# Altium PCB chinook_pcb_rotor.PcbDoc (part 2 of 2)
Units mil, origin at the board's own origin, x right, y up, seen from the top; angles counter-clockwise.
Board outline 4240 x 2750 mil, 2 copper layers (Top Layer, Bottom Layer); 69 components, 52 nets, 279 pads, 85 vias.
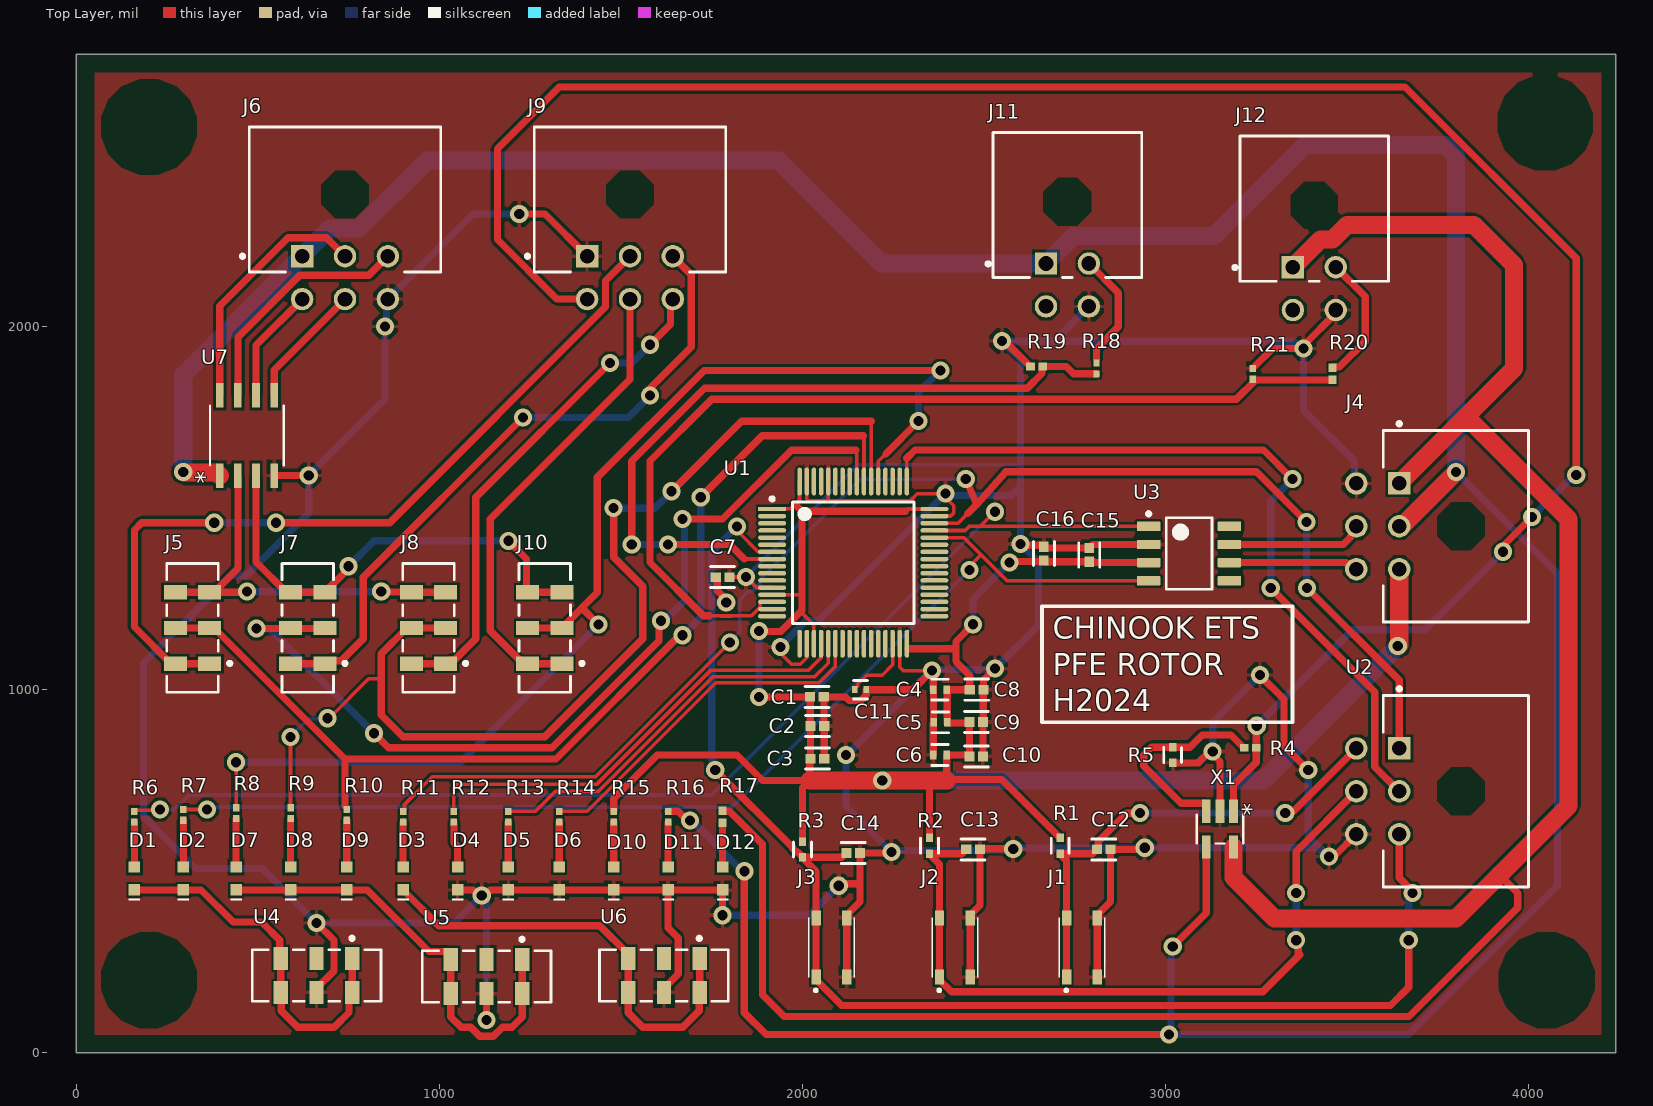
[diagram p0: Top Layer view]

## Via types
v1: diameter 50, hole 28, Top Layer to Bottom Layer, 85 vias

## Nets (pads, with @x,y where several pads share a name; then routed paths per layer and width w, separated by ;. In a path a pad name is that pad's centre, name@x,y a point inside that pad or via, vN(x,y) a via of type N, cw(c..) or ccw(c..) an arc to the next point about the centre after c; other vN are vias at no path point) (continued)
+12: (continued)
  Top Layer w20: J9.4 1324.21,2075.79 1160,2240 1160,2490 1330,2660 3660,2660 4131.48,2188.52 v1(4131.48,1590.98) ; X1.1 3187.4,737.4 3250,800 R4.2 3250,899.09 v1(3251.54,900.63) ; v1(3930,1380) 3930,1395.8 v1(4009.75,1475.55)
  Bottom Layer w20: v1(3251.54,900.63) 3515.91,1165 3715,1165 v1(3930,1380) ; v1(4009.75,1475.55) 4125.18,1590.98 v1(4131.48,1590.98)
BUSY_N: J7.1 J7.5 J9.3 | length 1849.1
  Top Layer w20: J7.5 J7.1 692.91,1080 730,1080 790,1140 790,1310 v1(1230,1750) ; v1(1580,1810) 1578.28,1811.72 1578.28,1828.28 1694.02,1944.02 1694.02,2142.99 J9.3
  Bottom Layer w20: v1(1230,1750) 1520,1750 v1(1580,1810)
BUSY_P: J5.1 J5.5 J9.2 | length 2236
  Top Layer w20: J5.1 J5.5 260.94,1071.57 160,1172.52 160,1440 180,1460 v1(380,1460) ; v1(550,1460) 863.09,1460 1457.8,2054.7 1457.8,2126.69 J9.2
  Bottom Layer w20: v1(380,1460) v1(550,1460)
DATA_H: J8.1 J8.5 J9.6 | length 1401.5
  Top Layer w20: J8.5 J8.1 1026.93,1081.26 1041.26,1081.26 1100,1140 1100,1530 v1(1470,1900) ; v1(1580,1950) 1636.76,2006.76 1636.76,2069.44 J9.6
  Bottom Layer w20: v1(1470,1900) 1530,1900 v1(1580,1950)
DATA_L: J9.5 J10.1 J10.5 | length 1307.7
  Top Layer w20: J10.1 J10.5 1230.94,1071.57 1140,1162.52 1140,1470 1525,1855 J9.5
ENC1_CLOCK: J6.5 U7.5 | length 346
  Top Layer w20: U7.5 545,1880.79 J6.5
ENC1_DATA: J6.2 U7.8 | length 690.4
  Top Layer w20: U7.8 395,2057.1 582.7,2244.8 689.09,2244.8 J6.2
ENC1_NCLOCK: J6.4 U7.6 | length 317.8
  Top Layer w20: U7.6 495,1948.9 J6.4
ENC1_NDATA: J6.3 U7.7 | length 665.8
  Top Layer w20: U7.7 445,1970.89 615.5,2141.39 805.6,2141.39 J6.3
GND: C1.2 C2.2 C3.2 C4.2 C5.2 C6.2 C7.2 C8.2 C9.2 C10.2 C11.2 C12.2 C13.2 C14.2 C15.2 C16.2 D4.1 D5.1 D6.1 D10.1 D11.1 D12.1 J1.3 J1.4 J2.3 J2.4 J3.3 J3.4 J4.4 J6.6 J9.1 J11.4 J12.4 R5.1 R19.1 R21.1 U1.12 U1.18 U1.31 U1.47 U1.60 U1.63 U2.6 U3.2 U4.6 U5.6 U6.6 U7.4 X1.2 | length 17401.6
  Top Layer w10: C7.2 1799.16,1310.32 1843.95,1310.32 v1(1844.26,1310.63) 1873.35,1281.54 1916.12,1281.54 U1.12 ; v1(1940,1118) 1947.65,1110.35 1947.65,1092.35 1970,1070 1993.81,1070 2011.61,1087.79 2011.61,1126.12 U1.18 ; U1.63 2012.05,1525.81 2017.91,1519.96 2070,1519.96 ; U1.60 2070.66,1573 2070.66,1520.62 2070,1519.96 ; U1.31 2267.95,1062.05 2277.41,1052.59 v1(2356.63,1052.59) ; U1.47 2363.88,1478.39 2408.39,1478.39 2416.93,1486.93 2416.93,1506.53 2394.29,1529.18 v1(2394.29,1540) 2316.44,1540 2296.4,1519.96 2070,1519.96
  Top Layer w20: U7.4 545.5,1590 v1(640,1590) ; U4.6 661.57,177.32 710,225.75 710,308.89 v1(661.57,357.31) ; D4.1 1093.38,448.5 1108.61,433.27 v1(1116.73,433.27) 1124.84,433.27 1140.08,448.5 D5.1 D6.1 D10.1 D11.1 ; v1(1130,90) U5.6 ; v1(1220,2310) 1290.79,2310 J9.1 ; U6.6 1618.43,177.32 1658.11,217.01 1658.11,315.83 1630,343.94 D11.1 ; v1(1780,378.8) D12.1 D11.1 ; C3.2 C2.2 2059.42,900.58 2059.42,980 2118.25,980 2128.09,970.16 2160.41,970.16 2175.75,985.5 C11.2 2304.04,1000 v1(2356.63,1052.59) 2360,1049.23 C4.2 2360,999.33 2361.3,998.03 C5.2 2361.3,909.33 2360,908.03 C6.2 ; v1(2100,460) 2105.74,465.74 2154.58,465.74 2158.84,470 ; J3.3 J3.4 2122.32,379.57 2158.84,416.09 2158.84,470 ; v1(2245.31,552.81) 2242.5,550 C14.2 2158.84,470 ; J2.3 J2.4 2462.32,379.57 2488.84,406.09 C13.2 2490.33,561.49 v1(2580.64,561.49) ; C10.2 C9.2 2498.26,911.59 2498.26,999.42 C8.2 2498.84,1026.67 v1(2530.83,1058.65) ; v1(2550,1960) 2557.28,1960 2627.28,1890 R19.1 ; v1(2600.74,1401.52) 2604.59,1397.68 2661.76,1397.68 2665,1394.45 C16.2 2665,1393.24 2668.24,1390 C15.2 ; C15.2@2799.16,1400 U3.2 ; J1.3 J1.4 2812.32,379.57 2848.84,416.09 C12.2 2938.14,560 v1(2942.79,564.65) ; R5.1 3090.23,798.35 3121.88,830 v1(3130,830) 3130,821.88 3150,801.88 X1.2 ; R21.1 3295.24,1940 v1(3380,1940) 3380,1948.12 3469.06,2037.17 J12.4 ; v1(3260,1040) 3326.66,973.34 3326.66,845.5 v1(3393.32,778.84) ; v1(3450,540) 3455.74,545.74 3469.64,545.74 U2.6
  Bottom Layer w10: v1(1844.26,1310.63) 2153.63,1620 2600.74,1620
  Bottom Layer w20: v1(1130,90) 1130,420 v1(1116.73,433.27) 1040.77,357.31 v1(661.57,357.31) 511.68,507.21 329.15,507.21 185,651.36 185,1073.28 426.72,1315 468.64,1315 640,1486.36 v1(640,1590) 850,1800 v1(850,2000) 854.06,2004.06 854.06,2071.73 J6.6 1092.32,2310 v1(1220,2310) ; v1(1780,378.8) 2018.8,378.8 v1(2100,460) ; v1(1940,1118) 1940,1120 2010,1190 2044.29,1190 v1(2394.29,1540) 2399.29,1535 2575.74,1535 2600.74,1560 ; J11.4 2693.27,1960 ; v1(3130,830) 3130,910 v1(3260,1040) ; v1(3393.32,778.84) 3393.32,596.68 v1(3450,540) 3441.88,540 3417.24,564.65 v1(2942.79,564.65) 2941.21,563.07 2582.21,563.07 v1(2580.64,561.49) 2576.3,557.15 2249.65,557.15 v1(2245.31,552.81) 2120,678.12 v1(2120,820) 2122.02,820 2354.61,1052.59 v1(2356.63,1052.59) 2359.66,1055.62 2527.8,1055.62 v1(2530.83,1058.65) 2650,1177.83 2650,1352.27 v1(2600.74,1401.52) 2595,1407.27 2594.45,1407.27 2600.74,1413.56 2600.74,1560 ; J4.4 3520.98,1572.91 3520.98,1629.02 3380,1770 v1(3380,1940) 3371.88,1940 3351.88,1960 2693.27,1960 ; 2600.74,1560 2600.74,1620 2600.74,1909.26 v1(2550,1960) 2693.27,1960
NetC7_1: C7.1 C14.1 J3.1 J3.2 R3.1 U1.7 U2.3 | length 3903.8
  Top Layer w10: v1(1819.57,1449.57) 1827.22,1441.92 1827.22,1430.54 1877.79,1379.97 1916.12,1379.97 U1.7
  Top Layer w20: v1(1760,778.35) 1973.16,565.19 1973.16,562.8 1983.12,552.84 1987.16,552.84 2000,540 R3.1 ; C7.1 1762,1310 1765.24,1306.76 1765.24,1272.88 1790,1248.12 v1(1790,1240) ; C14.1 2120.32,550 2108.66,538.35 R3.1 ; U2.3 3643.9,481.68 3680,445.58 v1(3680,440) ; v1(3670,310) 3670,180 3620,130 2108.11,130 2037.68,200.43 J3.1 J3.2 2037.68,499.02 2000,536.69 R3.1
  Bottom Layer w20: v1(1760,778.35) 1754.26,784.09 1754.26,800.8 1750,805.06 1750,1240 ; v1(1790,1240) 1750,1240 ; v1(1819.57,1449.57) 1750,1380 1750,1240 ; v1(3670,310) 3670,421.88 3680,431.88 v1(3680,440)
NetC11_1: C11.1 U1.30 | length 194.9
  Top Layer w10: C11.1 2144.25,1001.97 2152.87,1010.59 2152.87,1016.06 2176.82,1040 2220,1040 2248.27,1068.27 U1.30
NetC12_1: C12.1 J1.1 J1.2 R1.1 U2.4 | length 1293.9
  Top Layer w20: J1.1 J1.2 2727.68,529.02 2710,546.69 R1.1 2798.66,548.35 2810.32,560 2811.52,560 2814.76,563.24 2814.76,581.52 2892.73,659.49 2929.49,659.49 v1(2930,660) ; v1(3330,660) 3335.74,665.74 3353.42,665.74 U2.4
  Bottom Layer w20: v1(2930,660) v1(3330,660)
NetC13_1: C13.1 J2.1 J2.2 R2.1 U2.5 | length 2036.5
  Top Layer w20: C13.1 2450.32,560 2438.66,548.35 R2.1 2350,546.69 2377.68,519.02 J2.2 J2.1 2377.68,200.43 2410.47,167.64 3267.64,167.64 3370,270 3365.74,274.26 3365.74,304.26 v1(3360,310) ; v1(3360,440) 3360,554.21 U2.5
  Bottom Layer w20: v1(3360,310) v1(3360,440)
NetD1_1: D1.1 D2.1 U4.1 U4.3 U4.5 U4.7 | length 1028.8
  Top Layer w20: D1.1 D2.1 343.6,448.5 432.11,360 510,360 560.22,309.78 560.22,262.93 U4.3 U4.7 564.27,164.39 564.27,115.73 610,70 710,70 750.95,110.95 750.95,156.46 U4.5 U4.1
NetD1_2: D1.2 R6.1 | length 123.7
  Top Layer w20: D1.2 R6.1
NetD2_2: D2.2 R7.1 | length 128.7
  Top Layer w20: D2.2 R7.1
NetD3_1: D3.1 U6.1 U6.3 U6.5 U6.7 | length 1231
  Top Layer w20: D3.1 998.5,350 1441.81,350 1520,271.81 U6.3 U6.7 1520,110 1560,70 1670,70 1715.73,115.73 1715.73,164.39 U6.5 U6.1
NetD3_2: D3.2 R11.1 | length 123.7
  Top Layer w20: D3.2 R11.1
NetD4_2: D4.2 R12.1 | length 127.9
  Top Layer w20: R12.1 1040,578.37 1050,568.37 D4.2
NetD5_2: D5.2 R13.1 | length 123.7
  Top Layer w20: D5.2 R13.1
NetD6_2: D6.2 R14.1 | length 123.7
  Top Layer w20: D6.2 R14.1
NetD7_1: D7.1 D8.1 D9.1 U5.1 U5.3 U5.5 U5.7 | length 1236.5
  Top Layer w20: D7.1 D8.1 D9.1 801.44,448.5 971.2,278.74 1021.89,278.74 1031.57,269.06 U5.3 U5.7 1031.57,98.43 1060,70 1086.36,70 1111.36,45 1148.64,45 1173.64,70 1200,70 1228.43,98.43 U5.5 U5.1
NetD7_2: D7.2 R8.1 | length 133.7
  Top Layer w20: D7.2 R8.1
NetD8_2: D8.2 R9.1 | length 133.7
  Top Layer w20: D8.2 R9.1
NetD9_2: D9.2 R10.1 | length 128.7
  Top Layer w20: D9.2 R10.1
NetD10_2: D10.2 R15.1 | length 123.7
  Top Layer w20: D10.2 R15.1
NetD11_2: D11.2 R16.1 | length 123.7
  Top Layer w20: D11.2 R16.1
NetD12_2: D12.2 R17.1 | length 121.8
  Top Layer w20: D12.2 R17.1
NetJ4_5: J4.5 U3.7 | length 378.6
  Top Layer w20: U3.7 3490,1400 3509.83,1419.83 3509.83,1422.73 3525.79,1438.69 J4.5
NetJ4_6: J4.6 U3.6 | length 357.1
  Top Layer w20: U3.6 3496.36,1350 3514.47,1331.89 J4.6
NetJ5_2: J5.2 J5.6 R10.2 U1.55 | length 2862.2
  Top Layer w10: 2167.21,1699.53 2169.53,1697.21 U1.55
  Top Layer w20: J5.6 379.06,1170 740,809.06 ; 740,680 740,809.06 ; v1(1670,1150) 1662.43,1150 1321.48,809.06 740,809.06 ; v1(1720,1530) 1889.53,1699.53 2167.21,1699.53
  Bottom Layer w20: v1(1670,1150) 1720,1200 v1(1720,1530)
NetJ5_3: J5.3 J5.7 J8.3 J8.7 U7.2 | length 1094.2
  Top Layer w20: J5.7 J5.3 J5.3@379.06,1268.43 ; U7.2 445,1334.37 J5.3@379.06,1268.43 ; v1(470,1270) 468.43,1268.43 J5.3@379.06,1268.43 ; v1(840,1270) 840.79,1269.21 921.97,1269.21 J8.7 J8.3
  Bottom Layer w20: v1(470,1270) v1(840,1270)
NetJ7_2: J7.2 J7.6 U1.56 | length 2571.1
  Top Layer w10: 2147.53,1659.84 2149.84,1657.53 U1.56
  Top Layer w20: v1(496.34,1168.41) 682.9,1168.41 J7.2 ; v1(820,880) 860,840 1310,840 1605,1135 1605,1185 v1(1610,1190) ; v1(1670,1470) 1780,1470 1969.84,1659.84 2147.53,1659.84
  Bottom Layer w20: v1(496.34,1168.41) 497.6,1167.14 532.86,1167.14 v1(820,880) ; v1(1610,1190) 1618.12,1190 1632.01,1203.89 1633.89,1203.89 1675,1245 1675,1465 v1(1670,1470)
NetJ7_3: J7.3 J7.7 J10.3 J10.7 U7.3 | length 1287.4
  Top Layer w20: U7.3 495,1351.61 578.19,1268.43 J7.7 J7.3 750,1333.94 v1(750,1340) ; v1(1190,1410) 1240,1360 1240,1278.11 1242.76,1275.35 J10.7 J10.3
  Bottom Layer w20: v1(750,1340) 820,1410 v1(1190,1410)
NetJ8_2: J8.2 J8.6 R9.2 U1.54 | length 3111.1
  Top Layer w10: R9.2 v1(590,870) ; v1(691.35,921.35) 696.35,921.35 805,1030 840,1030 ; U1.54 2189.21,1739.21
  Top Layer w20: J8.2 J8.6 910.94,1170 840,1099.06 840,1030 840,930 900,870 1290,870 1560,1140 1560,1285 1480,1365 v1(1480,1500) ; v1(1639.69,1546.53) 1832.37,1739.21 2189.21,1739.21
  Bottom Layer w10: v1(590,870) 640,920 690,920 v1(691.35,921.35)
  Bottom Layer w20: v1(1480,1500) 1593.16,1500 v1(1639.69,1546.53)
NetJ10_2: J10.2 J10.6 R8.2 U1.53 | length 3341.9
  Top Layer w10: R8.2 v1(440,800) ; U1.53 2208.9,1628.9 2230,1650
  Top Layer w20: J10.6 J10.2 1388.62,1221.38 ; v1(1438.55,1179.43) 1396.61,1221.38 1388.62,1221.38 ; 2230,1650 v1(2320,1740) ; v1(2380.11,1879.2) 1729.2,1879.2 1435,1585 1435,1267.76 1388.62,1221.38
  Bottom Layer w20: v1(440,800) 1059.12,800 v1(1438.55,1179.43) ; v1(2320,1740) 2320,1819.09 v1(2380.11,1879.2)
NetJ11_2: J11.2 R18.2 | length 322.3
  Top Layer w20: J11.2 2870,2092.95 2870,2000 2810,1940 2810,1910
NetJ12_2: J12.2 R20.2 | length 358.4
  Top Layer w20: R20.2 3460,1887.72 3460.83,1888.54 3478.54,1888.54 3550,1960 3550,2082.95 J12.2
NetR4_1: R4.1 R5.2 X1.3 | length 579.9
  Top Layer w20: X1.3 3112.6,685 3110.6,687 3043,687 2940,790 2940,820 2961.65,841.65 3067.73,841.65 3101.07,875 3180.55,875 3214.72,840.83 3215.71,840.83 R4.1
NetR6_2: R6.2 U1.45 U3.1 | length 3363.5
  Top Layer w10: R6.2 162.62,667.38 227.38,667.38 v1(230,670) ; U1.45 2448.58,1438.58 2460,1450 2490,1450 ; v1(2530,1490) 2490,1450 ; U3.1 2490,1450
  Bottom Layer w10: v1(230,670) 270,670 310,710 1750,710 v1(2530,1490)
NetR7_2: R7.2 U1.44 U3.4 | length 3132.9
  Top Layer w10: R7.2 295.12,669.88 359.88,669.88 v1(360,670) ; U1.44 2444.53,1418.9 2491.72,1371.72 ; v1(2460,1330) 2460,1340 2491.72,1371.72 ; U3.4 2563.43,1300 2491.72,1371.72
  Bottom Layer w10: v1(360,670) 367,677 1807,677 v1(2460,1330)
NetR11_2: R11.2 U1.46 U2.1 | length 3946.8
  Top Layer w10: R11.2 903.86,668.62 903.86,683.86 980,760 1430,760 v1(1800,1130) ; U1.46 2428.27,1458.27 2455,1485
  Top Layer w20: v1(2450,1580) 2480,1510 ; 2455,1485 2480,1510 ; v1(3388.66,1462.11) 3250.77,1600 2560,1600 2480,1510 ; v1(3390,1280) 3643.9,1026.1 U2.1
  Bottom Layer w10: v1(1800,1130) 1800,1132.57 1827,1159.57 1827,1247 1850.63,1270.63 1860.83,1270.63 1884.26,1294.06 1884.26,1304.26 2160,1580 v1(2450,1580)
  Bottom Layer w20: v1(3388.66,1462.11) 3388.66,1281.34 v1(3390,1280)
NetR12_2: R12.2 U1.20 | length 1263.4
  Top Layer w10: R12.2 1040,730 1050,740 1434.04,740 1747.04,1053 2016.18,1053 2050.98,1087.79 2050.98,1126.12 U1.20
NetR13_2: R13.2 U1.21 | length 1104.1
  Top Layer w10: R13.2 1264.76,664.76 1320,720 1438.08,720 1754.08,1036 2034.28,1036 2071.42,1073.13 2071.42,1126.24 U1.21
NetR14_2: R14.2 U1.22 | length 988.6
  Top Layer w10: R14.2 1406.89,664.76 1761.12,1019 2045.57,1019 2090.79,1064.22 U1.22
NetR18_1: R18.1 R19.2 U1.8 | length 2039.9
  Top Layer w10: 1840,1360 1916.4,1360 U1.8
  Top Layer w20: v1(1530,1400) 1530,1630 1730,1830 2619.19,1830 2660.08,1870.89 2660.08,1889.17 2660.91,1890 R19.2 2726.36,1890 2746.36,1870 R18.1 ; v1(1630,1400) 1800,1400 1840,1360
  Bottom Layer w20: v1(1530,1400) v1(1630,1400)
NetR20_1: R20.1 R21.2 U1.14 U1.15 | length 2673.6
  Top Layer w10: 1743.28,1203.28 1774.39,1203.28 1774.67,1203 1805.33,1203 1805.61,1203.28 1859.47,1203.28 1883.78,1227.59 1883.78,1240.67 1884.84,1241.73 U1.14
  Top Layer w20: 1743.28,1203.28 1726.72,1203.28 1580,1350 1580,1630 1750,1800 3195.08,1800 3248.35,1853.27 R20.1
NetU1_49: U1.49 U2.2 | length 2200.4
  Top Layer w10: U1.49 2287.64,1637.64
  Top Layer w20: 2287.64,1637.64 2310,1660 3270,1660 v1(3350,1580) ; v1(3290,1280) 3576.69,993.31 3576.69,787.2 U2.2
  Bottom Layer w20: v1(3290,1280) 3290,1520 v1(3350,1580)
pads on no net: J4. J6. J9. J11. J11.3 J12. J12.3 U1.2 U1.3 U1.4 U1.5 U1.6 U1.9 U1.10 U1.11 U1.16 U1.17 U1.23 U1.24 U1.25 U1.26 U1.27 U1.28 U1.29 U1.33 U1.34 U1.35 U1.36 U1.37 U1.38 U1.39 U1.40 U1.41 U1.42 U1.43 U1.50 U1.51 U1.52 U1.57 U1.58 U1.59 U1.61 U1.62 U2. U3.5 U3.8 U4.2 U5.2 U6.2

## Polygon pours and split planes (outlines as drawn)
GND on Bottom Layer "Bottom Layer-GND" (solid, remove dead copper, pour order 0): 50,2700 4200,2700 4200,50 50,50
GND on Top Layer "Top Layer-GND" (solid, remove dead copper, pour order 1): 50,2700 4200,2700 4200,50 50,50

## Silkscreen, mask and mechanical layers (free items; w line width, h text height)
Top Overlay:
  lines w10: 2660,910 2660,1230 3350,1230 3350,910 2660,910
  text "CHINOOK ETS" at 2690,1140 h60
  text "PFE ROTOR" at 2690,1040 h60
  text "H2024" at 2690,940 h60
Mechanical 1:
  the board outline again, w10

## Text inside footprints (layer, text, board x,y; h text height)
U7: Mechanical 13 "*" at 426.5,1625.5 h50 r90; Top Overlay "*" at 379,1566.98 h50 r90
X1: Mechanical 13 "*" at 3169.4,653 h50 r270; Top Overlay "*" at 3189.4,687.5 h50 r270